# Altium PCB WEB_SERVER.PcbDoc (part 2 of 2)
Units mm, origin at the board's own origin, x right, y up, seen from the top; angles counter-clockwise.
Board outline 87.86 x 117.54 mm, 2 copper layers (Top Layer, Bottom Layer); 161 components, 198 nets, 620 pads, 277 vias.
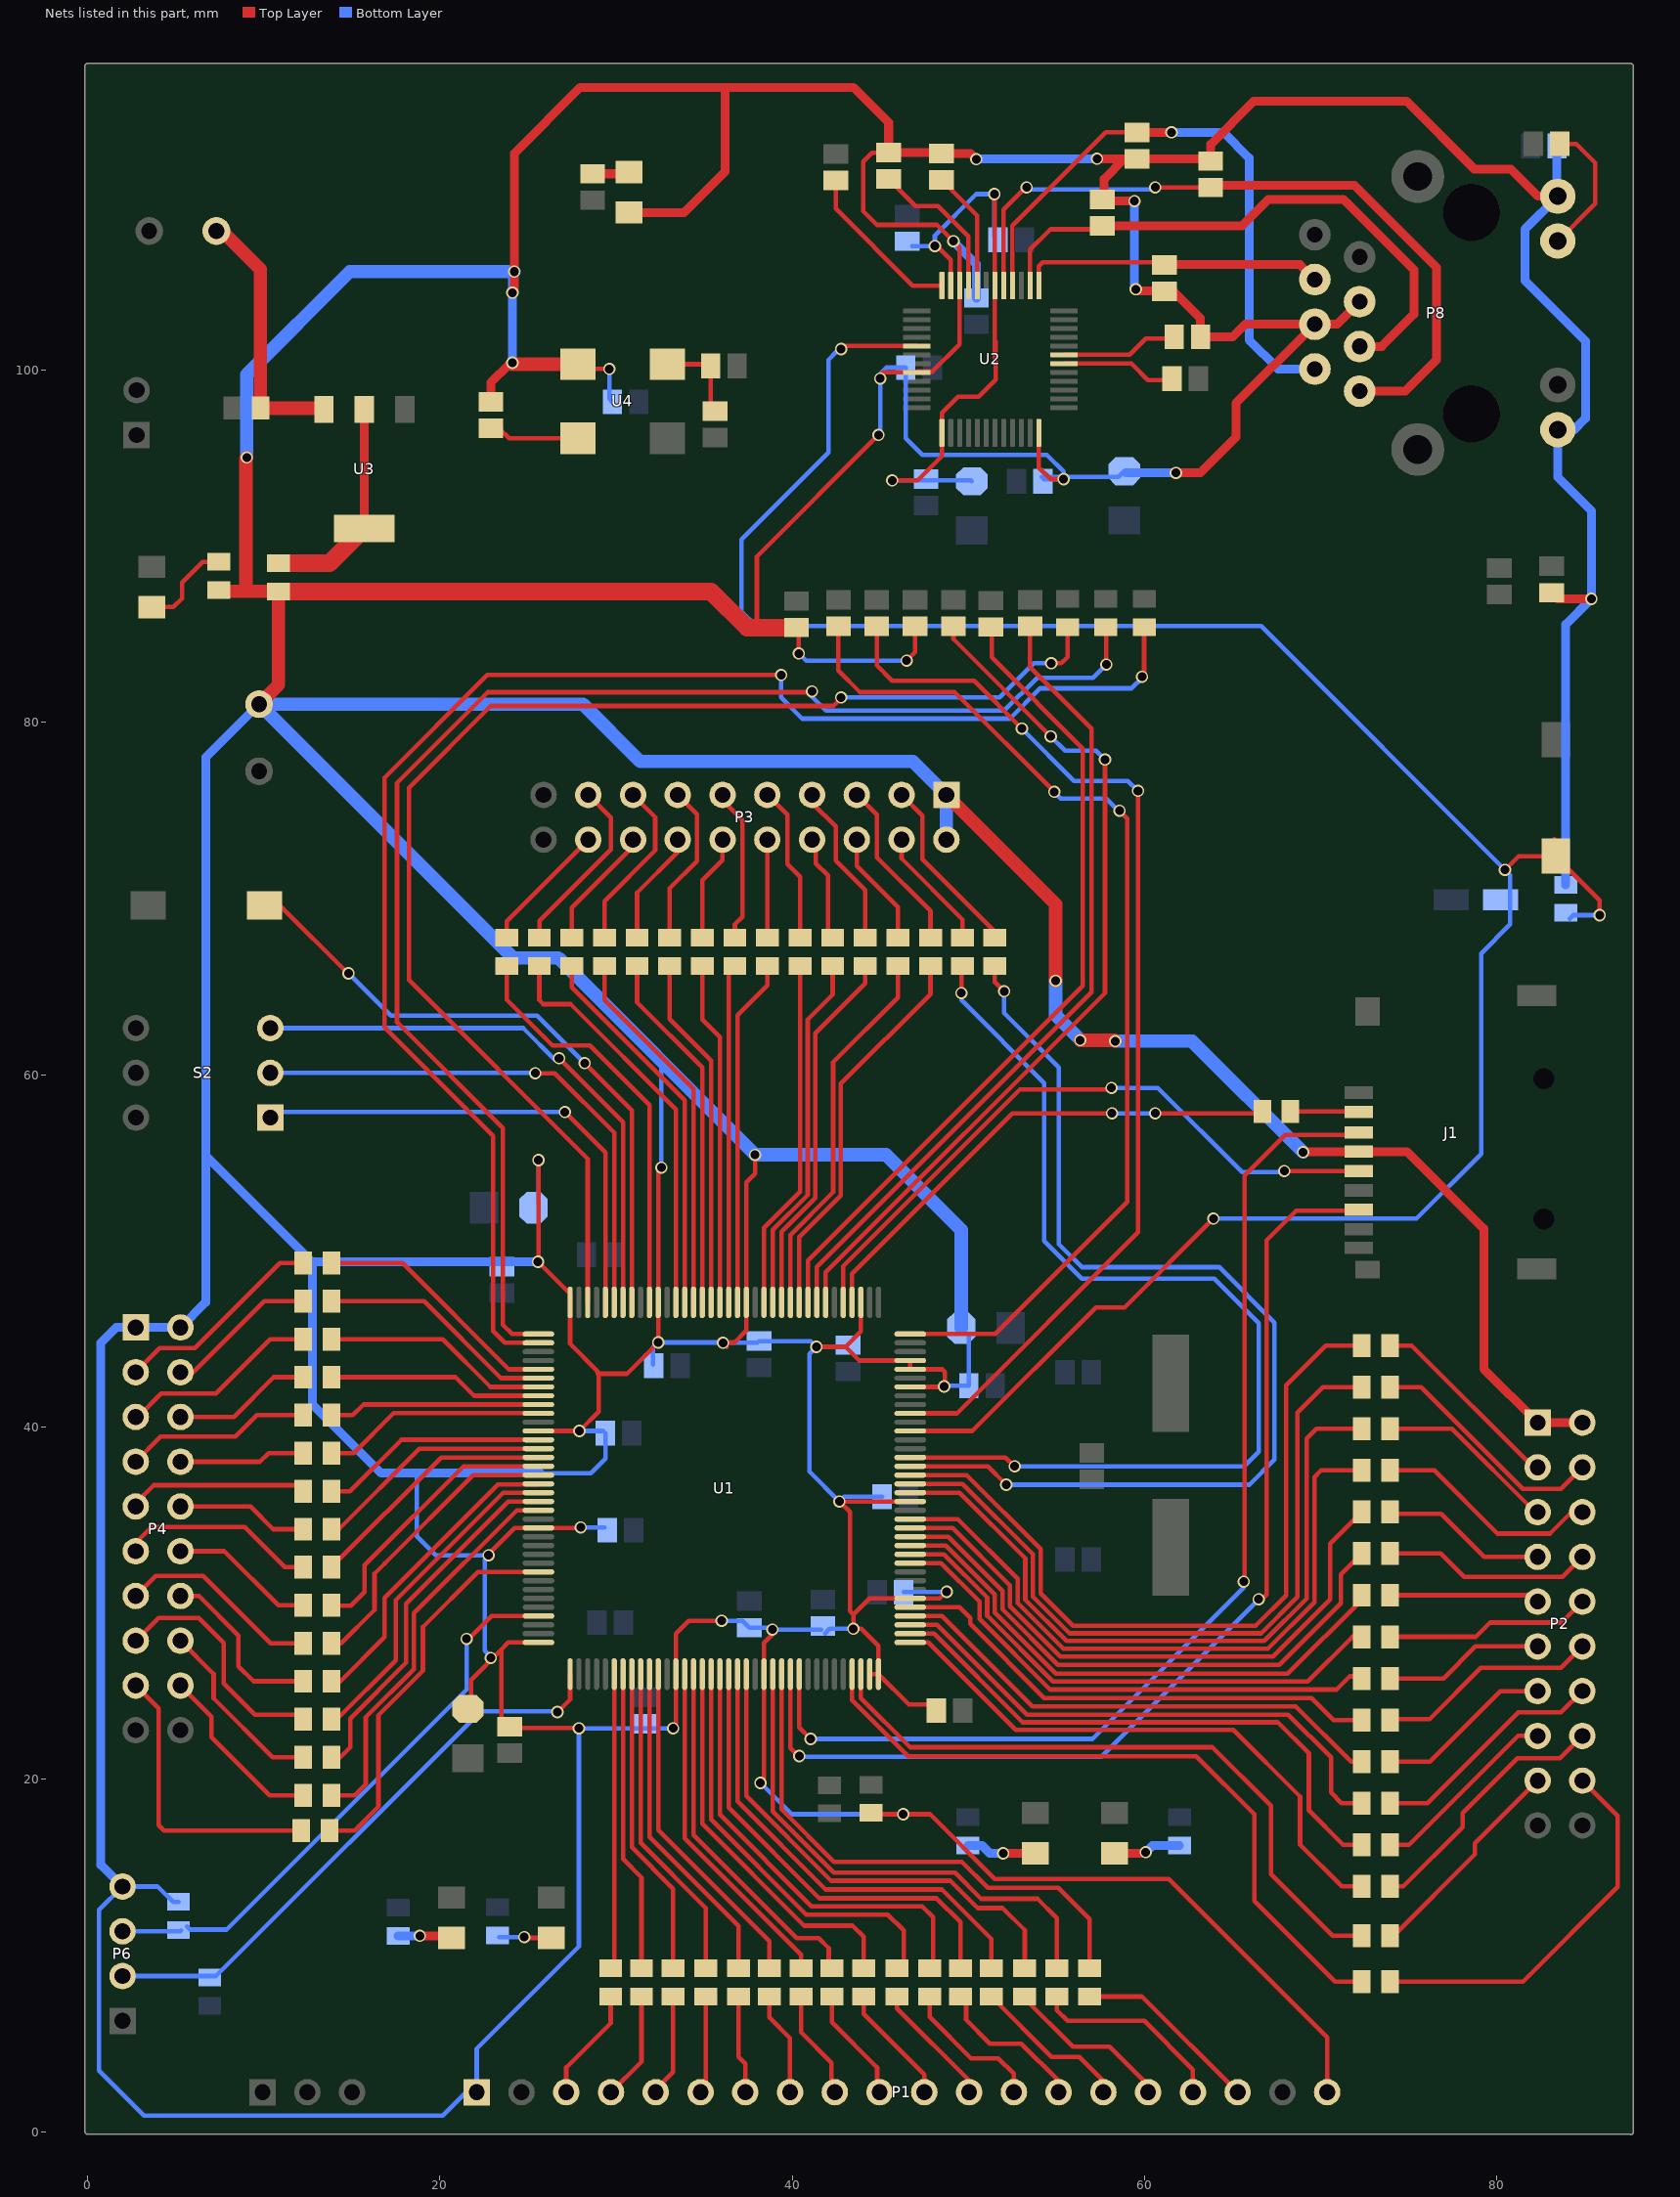
[diagram p2: the nets of this part, all layers, seen from the top]

## Via types
v1: diameter 0.7, hole 0.5, Top Layer to Bottom Layer, 196 vias
v2: diameter 1, hole 0.711, Top Layer to Bottom Layer, 81 vias

## Nets (pads, with @x,y where several pads share a name; then routed paths per layer and width w, separated by ;. In a path a pad name is that pad's centre, name@x,y a point inside that pad or via, vN(x,y) a via of type N, cw(c..) or ccw(c..) an arc to the next point about the centre after c; other vN are vias at no path point) (continued)
NetC23_1: C23.1 C24.1 C25.1 C26.1 U2.18 U2.23 U2.37 | length 37.1
  Top Layer w0.256: v1(45.675,93.725) 47.125,93.725 48.5,95.1 U2.37@48.5,96.42 48.5,97.55 49.425,98.475 50.575,98.475 51.55,99.45 51.55,101.6 ; v1(48.1,107.025) 48.225,107.025 49,106.25 U2.23@49,104.78 ; v1(51.475,109.975) 51.5,109.95 U2.18@51.5,104.78 51.5,100.65
  Bottom Layer w0.256: v1(45.675,93.725) 50.15,93.725 C25.1@50.2,93.675 ; C23.1@46.8,107.025 v1(48.1,107.025) 48.1,107.625 50.45,109.975 v1(51.475,109.975) C26.1@51.475,107.575
NetC34_1: C34.1 F1.2 U3.3 | length 14.8
  Top Layer w0.762: C34.1@7.325,107.875 7.65,107.875 9.825,105.7 F1.2@9.825,97.825 U3.3@13.35,97.825
NetD1_2: D1.2 R86.2 | length 3.9
  Top Layer w0.508: D1.2@58.3,15.807 60.068,15.807 v1(60.068,15.868)
  Bottom Layer w0.508: v1(60.068,15.868) 60.45,16.25 R86.2@61.975,16.25
NetD2_2: D2.2 R89.1 | length 4
  Top Layer w0.508: v1(51.968,15.807) D2.2@53.8,15.807
  Bottom Layer w0.508: R89.1@49.975,16.25 50.775,16.25 51.218,15.807 v1(51.968,15.807)
NetD3_2: D3.2 R90.1 | length 2.9
  Top Layer w0.508: v1(18.875,11.125) D3.2@20.557,11.125
  Bottom Layer w0.508: R90.1@17.65,11.125 v1(18.875,11.125)
NetD4_2: D4.2 R93.1 | length 3
  Top Layer w0.256: v1(24.8,11.05) 24.843,11.007 D4.2@26.325,11.007
  Bottom Layer w0.256: R93.1@23.375,11.05 v1(24.8,11.05)
NetD5_2: D5.2 R94.1 | length 2.1
  Top Layer w0.508: R94.1@28.675,111.125 30.657,111.125 D5.2@30.75,111.218
NetD7_1: D7.1 R103.1 | length 6
  Top Layer w0.256: D7.1@3.675,86.532 4.882,86.532 5.375,87.025 5.375,87.925 6.55,89.1 R103.1@7.475,89.1 ; D7.1@3.675,86.75 D7.1@4.275,86.75
NetR1_2: R1.2 U1.141 | length 39.9
  Top Layer w0.256: U1.141@43.4,25.975 43.4,24.5 46.587,21.312 62.937,21.312 66.225,18.025 66.225,13.1 70.8,8.525 R1.2@72.325,8.525
NetR2_1: R2.1 U1.10 | length 29.1
  Top Layer w0.256: U1.10@46.7,32.275 48.45,32.275 50.63,30.095 50.63,29.113 54.642,25.1 70.9,25.1 71.65,25.85 R2.1@71.925,25.85
NetR3_1: R3.1 U1.46 | length 22.2
  Top Layer w0.256: U1.46@40.4,47.075 40.4,50.787 42.759,53.145 42.759,59.484 47.85,64.575 R3.1@47.85,66.175
NetR4_2: R4.2 U1.142 | length 37.6
  Top Layer w0.256: U1.142@43.9,25.975 43.9,24.613 46.688,21.825 63.85,21.825 67.175,18.5 67.175,14.625 70.675,11.125 R4.2@72.325,11.125
NetR5_1: R5.1 U1.11 | length 30.3
  Top Layer w0.256: U1.11@46.7,32.775 48.612,32.775 51.063,30.323 51.063,29.292 54.806,25.55 69.25,25.55 71.794,28.094 R5.1@72.325,28.094
NetR6_1: R6.1 U1.47 | length 21.6
  Top Layer w0.256: U1.47@39.9,47.075 39.9,50.9 42.325,53.325 42.325,60.7 46,64.375 R6.1@46,66.175
NetR7_2: R7.2 U1.1 | length 33
  Top Layer w0.256: U1.1@46.7,27.775 47.725,27.775 52.693,22.807 65.043,22.807 68.825,19.025 68.825,16.3 71.2,13.925 R7.2@72.325,13.925
NetR8_1: R8.1 U1.12 | length 31.2
  Top Layer w0.256: U1.12@46.7,33.275 48.725,33.275 51.497,30.503 51.497,29.472 54.969,26 68.125,26 72.325,30.2 R8.1@72.325,30.456
NetR9_1: R9.1 U1.36 | length 59.6
  Top Layer w0.256: R9.1@42.625,85.45 42.625,82.925 43.85,81.7 49.225,81.7 v1(54.875,76.05) ; U1.36@46.7,45.275 51.525,45.275 59.025,52.775 59.025,74.525 v1(58.575,74.975)
  Bottom Layer w0.256: v1(54.875,76.05) 55.25,75.675 57.825,75.675 58.525,74.975 v1(58.575,74.975)
NetR10_1: R10.1 U1.48 | length 21.1
  Top Layer w0.256: U1.48@39.4,47.075 39.4,51.073 41.318,52.991 41.318,62.343 44.15,65.175 R10.1@44.15,66.175
NetR11_2: R11.2 U1.2 | length 32.5
  Top Layer w0.256: U1.2@46.7,28.275 48.05,28.275 53.084,23.241 67.559,23.241 69.325,21.475 69.325,18.225 71.263,16.287 R11.2@72.325,16.287
NetR12_1: R12.1 U1.13 | length 32.8
  Top Layer w0.256: U1.13@46.7,33.775 48.85,33.775 51.931,30.694 51.931,29.652 55.083,26.5 67.65,26.5 71.15,30 71.15,31.642 R12.1@72.325,32.817
NetR13_1: R13.1 U1.133 | length 30.5
  Top Layer w0.256: U1.133@39.4,25.975 39.4,18.3 42.375,15.325 49.625,15.325 51.1,13.85 55.1,13.85 56.875,12.075 R13.1@56.875,9.275
NetR14_2: R14.2 U1.3 | length 31
  Top Layer w0.256: U1.3@46.7,28.775 48.225,28.775 53.325,23.675 68.15,23.675 70.575,21.25 70.575,19.25 71.177,18.648 R14.2@72.325,18.648
NetR15_1: R15.1 U1.14 | length 34.6
  Top Layer w0.256: U1.14@46.7,34.275 49.1,34.275 52.365,31.01 52.365,29.831 55.214,26.982 67.282,26.982 70.525,30.225 70.525,33.379 R15.1@72.325,35.179
NetR16_2: R16.2 U1.40 | length 28.8
  Top Layer w0.256: U1.40@43.4,47.075 43.4,48.7 52.5,57.8 v1@58.1,57.8 ; v1(60.6,57.8) 66.575,57.8 R16.2@66.675,57.9
  Bottom Layer w0.256: v1@58,57.8 v1(60.6,57.8)
  other v1: 58.15,57.8
NetR17_2: R17.2 U1.100 | length 22.4
  Top Layer w0.256: R17.2@13.75,17.1 15.175,17.1 16.525,18.45 16.525,23.637 19.05,26.162 19.05,28.65 22.175,31.775 U1.100@25.6,31.775
NetR18_2: R18.2 U1.4 | length 29
  Top Layer w0.256: U1.4@46.7,29.275 48.5,29.275 53.625,24.15 68.575,24.15 71.715,21.01 R18.2@72.325,21.01
NetR19_1: R19.1 U1.15 | length 37.8
  Top Layer w0.256: U1.15@46.7,34.775 49.4,34.775 52.799,31.376 52.799,30.011 55.393,27.416 66.991,27.416 69.634,30.059 69.634,37.159 70.015,37.54 R19.1@72.325,37.54
NetR21_2: R21.2 U1.5 | length 28.5
  Top Layer w0.256: U1.5@46.7,29.775 49.5,29.775 50.1,29.175 50.1,28.825 54.3,24.625 69.475,24.625 70.729,23.371 R21.2@72.325,23.371
NetR22_1: R22.1 U1.18 | length 40.8
  Top Layer w0.256: U1.18@46.7,36.275 49.5,36.275 53.232,32.543 53.232,30.191 55.573,27.85 66.788,27.85 69.2,30.262 69.2,39.35 69.752,39.902 R22.1@72.325,39.902
NetR23_2: R23.2 U1.58 | length 21.2
  Top Layer w0.256: R23.2@29.35,66.175 29.35,64.225 34.4,59.175 U1.58@34.4,47.075
NetR24_1: R24.1 U1.19 | length 42.5
  Top Layer w0.256: U1.19@46.7,36.775 49.675,36.775 53.666,32.784 53.666,30.37 55.745,28.291 66.616,28.291 68.675,30.35 68.675,40.825 70.113,42.263 R24.1@72.325,42.263
NetR25_2: R25.2 U1.43 | length 49.5
  Top Layer w0.256: U1.43@41.9,47.075 41.9,48.775 57.75,64.625 v1(57.75,77.875) ; R25.2@49.15,85.45 49.15,84.725 v1(54.675,79.2)
  Bottom Layer w0.256: v1(54.675,79.2) 55.5,78.375 57.25,78.375 v1(57.75,77.875)
NetR26_2: R26.2 U1.59 | length 21.8
  Top Layer w0.256: R26.2@27.5,66.175 27.5,64.95 33.9,58.55 U1.59@33.9,47.075
NetR27_1: R27.1 U1.20 | length 44.2
  Top Layer w0.256: U1.20@46.7,37.275 49.9,37.275 54.1,33.075 54.1,30.55 55.925,28.725 66.3,28.725 68.025,30.45 68.025,42.375 70.275,44.625 R27.1@72.325,44.625
NetR28_2: R28.2 U1.60 | length 23.2
  Top Layer w0.256: R28.2@25.65,66.175 25.65,64.225 25.875,64 27.425,64 33.4,58.025 U1.60@33.4,47.075
NetR29_1: R29.1 U1.21 | length 60.9
  Top Layer w0.256: U1.21@46.7,37.775 51.1,37.775 v1(52.15,36.725) ; R29.1@51.5,66.175 51.5,65.25 v1(52.025,64.725)
  Bottom Layer w0.256: v1(52.025,64.725) 52.025,63.5 55.125,60.4 55.125,50.375 56.425,49.075 64.225,49.075 67.375,45.925 67.375,38.15 65.95,36.725 v1(52.15,36.725)
NetR30_2: R30.2 U1.63 | length 23.7
  Top Layer w0.256: R30.2@23.8,66.175 23.8,64.25 26.4,61.65 28.525,61.65 31.9,58.275 U1.63@31.9,47.075
NetR31_1: R31.1 U1.22 | length 59.2
  Top Layer w0.256: U1.22@46.7,38.275 52.1,38.275 v1@52.625,37.75 ; v1(49.6,64.625) R31.1@49.6,66.1
  Bottom Layer w0.256: v1(49.6,64.625) 49.6,64.225 54.3,59.525 54.3,50.55 56.425,48.425 63.95,48.425 66.475,45.9 66.475,38.6 65.65,37.775 v1(52.625,37.775)
NetR33_1: R33.1 U1.49 | length 20.5
  Top Layer w0.256: U1.49@38.9,47.075 38.9,51.187 40.884,53.17 40.884,63.134 42.3,64.55 R33.1@42.3,66.175
NetR34_1: R34.1 U1.70 | length 75.5
  Top Layer w0.256: U1.70@28.4,47.075 28.4,55.225 18.25,65.375 18.25,76.275 22.9,80.925 42.35,80.925 v1@42.775,81.35 ; v1(54.7,83.35) 55.275,83.35 55.625,83.7 R34.1@55.625,85.4
  Bottom Layer w0.256: v1(42.775,81.4) 51.775,81.4 53.725,83.35 v1(54.7,83.35)
NetR35_1: R35.1 U1.50 | length 19.9
  Top Layer w0.256: U1.50@38.4,47.075 38.4,51.3 40.45,53.35 R35.1@40.45,66.175
NetR36_1: R36.1 U1.73 | length 81.8
  Top Layer w0.256: U1.73@25.6,45.275 24.1,45.275 23.575,45.8 23.575,56.975 17.575,62.975 17.575,76.555 22.72,81.7 v1@41.175,81.7 ; R36.1@57.8,85.4 57.825,85.375 v1(57.825,83.275)
  Bottom Layer w0.256: v1(41.125,81.75) 41.125,81.45 41.925,80.65 52.025,80.65 53.9,82.525 57.075,82.525 v1(57.825,83.275)
NetR37_1: R37.1 U1.53 | length 19.8
  Top Layer w0.256: U1.53@36.9,47.075 36.9,63.375 38.6,65.075 R37.1@38.6,66.175
NetR38_1: R38.1 U1.74 | length 87.6
  Top Layer w0.256: U1.74@25.6,44.775 23.7,44.775 23.025,45.45 23.025,56.525 16.875,62.675 16.875,76.845 22.705,82.675 v1(39.375,82.675) ; v1@59.975,82.7 R38.1@59.975,85.4
  Bottom Layer w0.256: v1(39.375,82.675) 39.375,81.4 40.575,80.2 52.35,80.2 54.075,81.925 59.275,81.925 v1@59.875,82.525
  other v1: 59.85,82.575
NetR39_1: R39.1 U1.54 | length 18.8
  Top Layer w0.256: U1.54@36.4,47.075 R39.1@36.4,65.825
NetR40_1: R40.1 U1.55 | length 19.5
  Top Layer w0.256: R40.1@34.9,66.175 34.9,63.125 35.9,62.125 U1.55@35.9,47.075
NetR41_2: R41.2 U1.56 | length 20.1
  Top Layer w0.256: R41.2@33.05,66.175 33.05,63.15 35.4,60.8 U1.56@35.4,47.075
NetR42_1: R42.1 U1.114 | length 16.8
  Top Layer w0.256: R42.1@29.7,9.275 29.9,9.475 U1.114@29.9,25.975
NetR43_2: R43.2 U1.57 | length 20.6
  Top Layer w0.256: R43.2@31.2,66.175 31.2,64.1 34.9,60.4 U1.57@34.9,47.075
NetR45_1: R45.1 U1.27 | length 62.2
  Top Layer w0.256: R45.1@44.8,85.45 44.8,83.225 45.675,82.35 50.325,82.35 v1(53.038,79.637) ; U1.27@46.7,40.775 49.35,40.775 59.625,51.05 v1(59.625,76.1)
  Bottom Layer w0.256: v1(53.038,79.637) 56,76.675 59.05,76.675 v1(59.625,76.1)
NetR46_1: R46.1 U1.115 | length 17.1
  Top Layer w0.256: U1.115@30.4,25.975 30.4,15.475 31.45,14.425 R46.1@31.45,9.275
NetR47_2: R47.2 U1.87 | length 14.3
  Top Layer w0.256: R47.2@13.85,32.043 20.082,38.275 U1.87@25.6,38.275
NetR48_1: R48.1 U1.116 | length 17.7
  Top Layer w0.256: U1.116@30.9,25.975 30.9,16.15 33.25,13.8 R48.1@33.25,9.275
NetR49_2: R49.2 U1.88 | length 15.9
  Top Layer w0.256: R49.2@13.886,29.85 14.95,29.85 15.725,30.625 15.725,32.15 21.35,37.775 U1.88@25.6,37.775
NetR50_1: R50.1 U1.117 | length 18.2
  Top Layer w0.256: U1.117@31.4,25.975 31.4,16.4 35.1,12.7 R50.1@35.1,9.275
NetR51_2: R51.2 U1.89 | length 16.9
  Top Layer w0.256: R51.2@13.85,27.729 14.404,27.729 16.3,29.625 16.3,31.675 16.882,32.257 21.9,37.275 U1.89@25.6,37.275
NetR52_1: R52.1 U1.44 | length 46.3
  Top Layer w0.256: U1.44@41.4,47.075 41.4,49.075 57,64.675 57,79.625 53.5,83.125 R52.1@53.5,85.45
NetR53_1: R53.1 U1.118 | length 18.8
  Top Layer w0.256: U1.118@31.9,25.975 31.9,16.725 36.95,11.675 R53.1@36.95,9.275
NetR54_2: R54.2 U1.90 | length 17.7
  Top Layer w0.256: R54.2@13.85,25.571 14.371,25.571 16.875,28.075 16.875,30.3 23.306,36.731 25.6,36.731 U1.90@25.6,36.775
NetR55_1: R55.1 U1.45 | length 47
  Top Layer w0.256: U1.45@40.9,47.075 40.9,49.446 56.5,65.046 56.5,78.5 51.325,83.675 R55.1@51.325,85.45
NetR56_1: R56.1 U1.119 | length 19.3
  Top Layer w0.256: U1.119@32.4,25.975 32.4,17.125 38.7,10.825 R56.1@38.7,9.275
NetR57_2: R57.2 U1.91 | length 19.1
  Top Layer w0.256: R57.2@13.85,23.414 14.164,23.414 17.5,26.75 17.5,30.175 23.6,36.275 U1.91@25.6,36.275
NetR59_1: R59.1 U1.122 | length 19.4
  Top Layer w0.256: U1.122@33.9,25.975 33.906,25.969 33.906,22.628 33.9,22.623 33.9,16.65 40.5,10.05 R59.1@40.5,9.275
NetR60_2: R60.2 U1.92 | length 20.7
  Top Layer w0.256: R60.2@13.85,21.257 14.357,21.257 14.925,21.825 14.925,23.45 18.099,26.624 18.099,29.974 23.9,35.775 U1.92@25.6,35.775
NetR61_1: R61.1 U1.123 | length 20.9
  Top Layer w0.256: U1.123@34.4,25.975 34.4,16.857 40.257,11 41.5,11 42.075,10.425 42.075,9.45 R61.1@42.25,9.275 R61.1@41.982,9.275
NetR62_2: R62.2 U1.93 | length 22.8
  Top Layer w0.256: R62.2@13.85,19.325 R62.2@13.85,19.1 15.175,19.1 15.8,19.725 15.8,23.525 18.532,26.257 18.532,29.432 24.375,35.275 U1.93@25.6,35.275
NetR63_1: R63.1 U1.77 | length 14.2
  Top Layer w0.256: R63.1@13.85,49.3 17.9,49.3 23.925,43.275 U1.77@25.6,43.275
NetR64_2: R64.2 U1.124 | length 22.1
  Top Layer w0.256: U1.124@34.9,25.975 34.9,17.475 40.675,11.7 43.425,11.7 44.05,11.075 R64.2@44.05,9.275
NetR65_1: R65.1 U1.78 | length 13.6
  Top Layer w0.256: R65.1@13.85,47.143 19.107,47.143 23.475,42.775 U1.78@25.6,42.775
NetR66_2: R66.2 U1.125 | length 23.6
  Top Layer w0.256: U1.125@35.4,25.975 35.4,17.725 40.8,12.325 45.425,12.325 46.325,11.425 R66.2@46.325,9.6
NetR68_1: R68.1 U1.79 | length 12.9
  Top Layer w0.256: R68.1@13.85,44.986 20.164,44.986 22.875,42.275 U1.79@25.6,42.275
NetR69_2: R69.2 U1.126 | length 25.5
  Top Layer w0.256: U1.126@35.9,25.975 35.9,18 41.1,12.8 47.375,12.8 48,12.175 48,9.475 R69.2@47.8,9.275
NetR70_1: R70.1 U1.80 | length 12.2
  Top Layer w0.256: R70.1@13.85,42.829 20.896,42.829 21.95,41.775 U1.80@25.6,41.775
NetR71_2: R71.2 U1.127 | length 26
  Top Layer w0.256: U1.127@36.4,25.975 36.4,18.4 41.55,13.25 48.2,13.25 49.55,11.9 R71.2@49.55,9.275
NetR72_1: R72.1 U1.81 | length 12
  Top Layer w0.256: R72.1@13.85,40.671 15.071,40.671 15.675,41.275 U1.81@25.6,41.275
NetR73_2: R73.2 U1.128 | length 26.5
  Top Layer w0.256: U1.128@36.9,25.975 36.9,18.75 41.9,13.75 48.5,13.75 51.3,10.95 R73.2@51.3,9.275
NetR74_1: R74.1 U1.82 | length 12.7
  Top Layer w0.256: R74.1@13.85,38.514 15.114,38.514 17.381,40.781 25.594,40.781 U1.82@25.6,40.775
NetR76_2: R76.2 U1.129 | length 28
  Top Layer w0.256: U1.129@37.4,25.975 37.4,19.062 42.212,14.25 48.975,14.25 50.525,12.7 51.95,12.7 53.2,11.45 R76.2@53.2,9.275
NetR77_1: R77.1 U1.85 | length 13
  Top Layer w0.256: R77.1@13.85,36.357 14.907,36.357 17.825,39.275 U1.85@25.6,39.275
NetR78_2: R78.2 U1.132 | length 29.3
  Top Layer w0.256: U1.132@38.9,25.975 38.9,18.175 42.375,14.7 49.25,14.7 50.725,13.225 53.925,13.225 55.025,12.125 R78.2@55.025,9.275
NetR79_1: R79.1 U1.86 | length 13.6
  Top Layer w0.256: R79.1@13.85,34.2 14.275,34.2 18.85,38.775 U1.86@25.6,38.775
NetR81_1: R81.1 U2.7 | length 6.5
  Top Layer w0.256: U2.7@55.43,100.85 59.15,100.85 60.075,101.775 R81.1@61.575,101.775
NetR82_1: R82.1 U2.21 | length 8.7
  Top Layer w0.256: R82.1@45.475,110.825 47,109.3 48.275,109.3 50,107.575 U2.21@50,104.78
NetR83_1: R83.1 U2.20 | length 6.8
  Top Layer w0.256: R83.1@48.475,110.775 50.5,108.75 U2.20@50.5,104.78
NetR84_1: R84.1 U2.24 | length 9.4
  Top Layer w0.256: R84.1@42.475,110.75 42.475,109.15 46.845,104.78 U2.24@48.5,104.78
NetR96_2: R96.2 U3.2 U3.4 | length 12.4
  Top Layer w0.5: U3.4@15.725,91 U3.2@15.725,97.75
  Top Layer w1: R96.2@10.85,89.025 13.75,89.025 U3.4@15.725,91
NetR99_1: R99.1 U4.1 | length 5.2
  Top Layer w0.256: R99.1@22.9,96.675 23.375,96.675 23.933,96.117 U4.1@27.835,96.117
NetR102_2: R102.2 R105.1 U4.3 | length 5
  Top Layer w0.256: U4.3@32.915,100.317 R102.2@35.283,100.317 ; R102.2@35.375,100.225 35.375,97.9 R105.1@35.625,97.65
NRST: C22.1 R85.1 SW1.1 U1.25 U2.29 | length 137.2
  Top Layer w0.256: v1(42.775,101.175) 42.95,101.35 U2.29@47.07,101.35 ; U1.25@46.7,39.775 50.223,39.775 57.232,46.785 58.86,46.785 v1(63.9,51.825) ; v1(80.45,71.625) 81.225,72.4 SW1.1@83.25,72.4 ; SW1.1@83.25,73.35 SW1.1@83.25,72.4 ; v1(85.825,69.05) 85.825,69.9 SW1.1@83.325,72.4 SW1.1@83.25,72.4
  Bottom Layer w0.256: v1(42.775,101.175) 42.675,101.075 42.564,101.075 42.058,100.569 42.058,95.308 37.125,90.375 37.125,86.275 37.95,85.45 66.625,85.45 v1(80.45,71.625) 80.75,71.325 80.75,68.525 79.1,66.875 79.1,55.5 75.425,51.825 v1(63.9,51.825) ; R85.1@84.125,68.85 84.325,69.05 v1(85.825,69.05)
PA8: P4.17 R17.1 | length 16.7
  Top Layer w0.256: P4.17@2.75,25.33 4.05,24.03 4.05,17.4 4.35,17.1 R17.1@12.15,17.1
PB0: P3.5 R3.2 | length 9.8
  Top Layer w0.256: P3.5@43.67,75.875 44.8,74.745 44.8,72.325 47.85,69.275 R3.2@47.85,67.775
PB1: P3.6 R6.2 | length 6.5
  Top Layer w0.256: P3.6@43.67,73.335 43.67,71.83 46,69.5 R6.2@46,67.775
PB2: P3.7 R10.2 | length 9.4
  Top Layer w0.256: P3.7@41.13,75.875 41.13,75.42 42.475,74.075 42.475,72.15 44.15,70.475 R10.2@44.15,67.775
PB3: P1.18 R13.2 | length 10.7
  Top Layer w0.256: R13.2@56.875,7.675 59.855,7.675 P1.18@65.28,2.25
PD0: P1.3 R42.2 | length 6.5
  Top Layer w0.256: P1.3@27.18,2.25 27.18,3.655 29.7,6.175 R42.2@29.7,7.675
PD1: P1.4 R46.2 | length 6.1
  Top Layer w0.256: P1.4@29.72,2.25 31.45,3.98 R46.2@31.45,7.675
PD2: P1.5 R48.2 | length 5.8
  Top Layer w0.256: P1.5@32.26,2.25 32.26,2.41 33.25,3.4 R48.2@33.25,7.675
PD3: P1.6 R50.2 | length 5.5
  Top Layer w0.256: P1.6@34.8,2.25 35.1,2.55 R50.2@35.1,7.675
PD4: P1.7 R53.2 | length 5.6
  Top Layer w0.256: R53.2@36.95,7.675 36.95,4.25 37.34,3.86 P1.7@37.34,2.25
PD5: P1.8 R56.2 | length 5.9
  Top Layer w0.256: R56.2@38.7,7.675 38.7,6.5 39.88,5.32 P1.8@39.88,2.25
PD6: P1.9 R59.2 | length 6.2
  Top Layer w0.256: R59.2@40.5,7.675 40.5,5.65 42.225,3.925 42.225,2.445 P1.9@42.42,2.25
PD7: P1.10 R61.2 | length 6.5
  Top Layer w0.256: R61.2@42.25,7.675 42.25,6.225 44.825,3.65 44.825,2.385 P1.10@44.96,2.25
PD8: P4.3 R63.2 | length 12.1
  Top Layer w0.256: P4.3@2.75,43.11 4.115,44.475 6.1,44.475 10.925,49.3 R63.2@12.25,49.3
PD9: P4.4 R65.2 | length 8.6
  Top Layer w0.256: P4.4@5.29,43.11 6.01,43.11 10.043,47.143 R65.2@12.25,47.143
PD10: P4.5 R68.2 | length 11.3
  Top Layer w0.256: P4.5@2.75,40.57 2.87,40.57 4.2,41.9 7.3,41.9 10.386,44.986 R68.2@12.25,44.986
PD11: P4.6 R70.2 | length 7.9
  Top Layer w0.256: P4.6@5.29,40.57 8.32,40.57 10.579,42.829 R70.2@12.25,42.829
PD12: P4.7 R72.2 | length 10.6
  Top Layer w0.256: P4.7@2.75,38.03 4.17,39.45 8.4,39.45 9.621,40.671 R72.2@12.25,40.671
PD13: P4.8 R74.2 | length 7.2
  Top Layer w0.256: P4.8@5.29,38.03 9.805,38.03 10.289,38.514 R74.2@12.25,38.514
PD14: P4.9 R77.2 | length 10.3
  Top Layer w0.256: P4.9@2.75,35.49 2.75,35.675 3.775,36.7 11.907,36.7 R77.2@12.25,36.357
PD15: P4.10 R79.2 | length 7.5
  Top Layer w0.256: P4.10@5.29,35.49 9.26,35.49 10.55,34.2 R79.2@12.25,34.2
PE0: P2.18 R1.1 | length 22
  Top Layer w0.256: R1.1@73.925,8.525 81.475,8.525 86.85,13.9 86.85,17.92 P2.18@84.84,19.93
PE1: P2.17 R4.1 | length 12.4
  Top Layer w0.256: R4.1@73.925,11.125 74.125,11.125 78.75,15.75 78.75,16.38 P2.17@82.3,19.93
PE2: P2.16 R7.1 | length 14.9
  Top Layer w0.256: R7.1@73.925,13.925 74.675,13.925 78.05,17.3 78.05,18.1 81.15,21.2 83.57,21.2 P2.16@84.84,22.47
PE3: P2.15 R11.1 | length 10.9
  Top Layer w0.256: R11.1@73.925,16.287 75.012,16.287 81.195,22.47 P2.15@82.3,22.47
PE4: P2.14 R14.1 | length 13.6
  Top Layer w0.256: R14.1@73.925,18.648 76.048,18.648 81.2,23.8 83.63,23.8 P2.14@84.84,25.01
PE5: P2.13 R18.1 | length 10
  Top Layer w0.256: R18.1@73.925,21.01 76.185,21.01 80.185,25.01 P2.13@82.3,25.01
PE6: P2.12 R21.1 | length 12.6
  Top Layer w0.256: R21.1@73.925,23.371 73.979,23.425 76.175,23.425 79.075,26.325 83.615,26.325 P2.12@84.84,27.55
PE7: P3.15 R23.1 | length 9.8
  Top Layer w0.256: R23.1@29.35,67.775 29.35,69.85 32.225,72.725 32.225,74.62 P3.15@30.97,75.875
PE8: P3.16 R26.1 | length 7
  Top Layer w0.256: R26.1@27.5,67.775 27.5,69.475 30.97,72.945 P3.16@30.97,73.335
PE9: P3.17 R28.1 | length 10.3
  Top Layer w0.256: R28.1@25.65,67.775 25.675,67.8 25.675,68.725 29.725,72.775 29.725,74.58 P3.17@28.43,75.875
PE10: P3.18 R30.1 | length 7.5
  Top Layer w0.256: R30.1@23.8,67.775 23.8,68.705 P3.18@28.43,73.335
PF0: P2.11 R2.2 | length 9.1
  Top Layer w0.256: R2.2@73.925,25.733 76.958,25.733 78.775,27.55 P2.11@82.3,27.55
PF1: P2.10 R5.2 | length 11.7
  Top Layer w0.256: R5.2@73.925,28.094 78.794,28.094 79.6,28.9 83.65,28.9 P2.10@84.84,30.09
PF2: P2.9 R8.2 | length 8.5
  Top Layer w0.256: R8.2@73.925,30.456 81.934,30.456 P2.9@82.3,30.09
PF3: P2.8 R12.2 | length 11.9
  Top Layer w0.256: R12.2@73.925,32.817 76.808,32.817 78.125,31.5 83.71,31.5 P2.8@84.84,32.63
PF4: P2.7 R15.2 | length 9.4
  Top Layer w0.256: R15.2@73.925,35.179 74.029,35.075 76.825,35.075 79.27,32.63 P2.7@82.3,32.63
PF5: P2.6 R19.2 | length 12.9
  Top Layer w0.256: R19.2@73.925,37.54 76.435,37.54 80.025,33.95 83,33.95 84.22,35.17 P2.6@84.84,35.17
PF6: P2.5 R22.2 | length 10.3
  Top Layer w0.256: R22.2@73.925,39.902 77.435,39.902 82.167,35.17 P2.5@82.3,35.17
PF7: P2.4 R24.2 | length 13.8
  Top Layer w0.256: R24.2@73.925,42.263 75.687,42.263 81.45,36.5 83.63,36.5 P2.4@84.84,37.71
PF8: P2.3 R27.2 | length 11.2
  Top Layer w0.256: R27.2@73.925,44.625 75.15,44.625 82.065,37.71 P2.3@82.3,37.71
PF9: P3.3 R29.2 | length 10.3
  Top Layer w0.256: P3.3@46.21,75.875 47.4,74.685 47.4,72.225 51.5,68.125 R29.2@51.5,67.775
PF10: P3.4 R31.2 | length 7
  Top Layer w0.256: P3.4@46.21,73.335 46.21,72.265 49.675,68.8 R31.2@49.675,67.775
PF11: P3.8 R33.2 | length 6
  Top Layer w0.256: P3.8@41.13,73.335 41.35,73.115 41.35,71.975 42.025,71.3 42.025,68.05 R33.2@42.3,67.775
PF12: P3.9 R35.2 | length 8.9
  Top Layer w0.256: P3.9@38.59,75.875 39.725,74.74 39.725,71.95 40.45,71.225 R35.2@40.45,67.775
PF13: P3.10 R37.2 | length 5.5
  Top Layer w0.256: R37.2@38.59,67.785 P3.10@38.59,73.335
PF14: P3.11 R39.2 | length 8.7
  Top Layer w0.256: P3.11@36.05,75.875 36.05,75.575 37.175,74.45 37.175,68.95 36.75,68.525 R39.2@36.75,67.775
PF15: P3.12 R40.2 | length 6
  Top Layer w0.256: R40.2@34.9,67.775 34.9,71.025 36.05,72.175 P3.12@36.05,73.335
PG0: P3.13 R41.1 | length 9.2
  Top Layer w0.256: R41.1@33.05,67.775 33.05,70.575 34.6,72.125 34.6,74.785 P3.13@33.51,75.875
PG1: P3.14 R43.1 | length 6.5
  Top Layer w0.256: R43.1@31.2,67.775 31.2,70.325 33.51,72.635 P3.14@33.51,73.335
PG2: P4.11 R47.1 | length 11.3
  Top Layer w0.256: P4.11@2.75,32.95 2.75,33.425 3.65,34.325 8.925,34.325 11.207,32.043 R47.1@12.25,32.043
PG3: P4.12 R49.1 | length 8.2
  Top Layer w0.256: P4.12@5.29,32.95 7.775,32.95 10.839,29.886 R49.1@12.25,29.886
PG4: P4.13 R51.1 | length 11.6
  Top Layer w0.256: P4.13@2.75,30.41 3.89,31.55 6.575,31.55 10.396,27.729 R51.1@12.25,27.729
PG5: P4.14 R54.1 | length 10
  Top Layer w0.256: P4.14@5.29,30.41 6.34,30.41 8.575,28.175 8.575,26.425 9.429,25.571 R54.1@12.25,25.571
PG6: P4.15 R57.1 | length 13.8
  Top Layer w0.256: P4.15@2.75,27.87 4.055,29.175 6.325,29.175 7.75,27.75 7.75,25.45 9.525,23.675 11.989,23.675 R57.1@12.25,23.414
PG7: P4.16 R60.1 | length 10.5
  Top Layer w0.256: P4.16@5.29,27.87 7.175,25.985 7.175,24.6 10.518,21.257 R60.1@12.25,21.257
PG8: P4.18 R62.1 | length 10.2
  Top Layer w0.256: P4.18@5.29,25.33 5.29,25.31 7.05,23.55 7.05,22.4 10.35,19.1 R62.1@12.25,19.1
PG9: P1.11 R64.1 | length 6.9
  Top Layer w0.256: R64.1@44.05,7.675 44.05,6.7 47.5,3.25 P1.11@47.5,2.25
PG10: P1.12 R66.1 | length 7.1
  Top Layer w0.256: R66.1@45.95,7.675 45.95,7 50.04,2.91 P1.12@50.04,2.25
PG11: P1.13 R69.1 | length 8.3
  Top Layer w0.256: R69.1@47.8,7.675 47.8,6.525 50.15,4.175 51.7,4.175 52.58,3.295 P1.13@52.58,2.25
PG12: P1.14 R71.1 | length 8.8
  Top Layer w0.256: R71.1@49.55,7.675 49.875,7.35 49.875,6.35 51.225,5 53,5 55.12,2.88 P1.14@55.12,2.25
PG13: P1.15 R73.1 | length 9
  Top Layer w0.256: R73.1@51.3,7.675 54.725,4.25 56.3,4.25 57.66,2.89 P1.15@57.66,2.25
PG14: P1.16 R76.1 | length 9.6
  Top Layer w0.256: R76.1@53.2,7.675 53.2,7.55 55.925,4.825 58.025,4.825 60.2,2.65 P1.16@60.2,2.25
PG15: P1.17 R78.1 | length 11.2
  Top Layer w0.256: R78.1@55.025,7.675 55.025,6.9 55.625,6.3 59.975,6.3 62.74,3.535 P1.17@62.74,2.25
RJ45RD+: P8.3 R100.1 U2.14 | length 32.9
  Top Layer w0.256: U2.14@53.5,104.78 53.5,106.825 54.65,107.975 R100.1@57.6,107.975
  Top Layer w0.5: R100.1@57.6,108.175 65.525,108.175 67.025,109.675 71.275,109.675 75.275,105.675 75.275,103.15 73.45,101.325 P8.3@72.2,101.325
RJ45RD-: P8.6 R101.1 U2.13 | length 16.9
  Top Layer w0.256: U2.13@54,104.78 54,105.88 54.225,106.105 R101.1@60.45,106.105
  Top Layer w0.5: R101.1@60.775,105.975 68.81,105.975 P8.6@69.66,105.125
RJ45TD+: P8.1 R97.1 U2.17 | length 42.3
  Top Layer w0.256: U2.17@52,104.78 52,109.1 53.25,110.35 v1(53.3,110.35) ; v1(60.6,110.35) R97.1@63.725,110.35
  Top Layer w0.5: R97.1@63.725,110.175 64.025,110.475 71.9,110.475 76.575,105.8 76.575,100.575 74.785,98.785 P8.1@72.2,98.785
  Bottom Layer w0.256: v1(53.3,110.35) 53.25,110.35 53.131,110.231 60.481,110.231 v1(60.6,110.35)
RJ45TD-: P8.2 R98.1 U2.16 | length 34.4
  Top Layer w0.256: U2.16@52.5,104.78 52.5,108.175 57.8,113.475 R98.1@59.575,113.475
  Top Layer w0.5: R98.1@59.575,113.475 v1(61.525,113.475)
  Bottom Layer w0.5: v1(61.525,113.475) 64.475,113.475 65.925,112.025 65.925,101.7 67.58,100.045 P8.2@69.66,100.045
SD_CS: J1.2 R16.1 | length 3.9
  Top Layer w0.256: R16.1@68.275,57.9 J1.2@72.125,57.9
SD_MISO: J1.7 U1.134 | length 61.5
  Top Layer w0.256: U1.134@39.9,25.975 39.9,21.775 40.35,21.325 v1(40.4,21.325) ; v1(66.475,30.225) 66.65,30.225 66.925,30.5 66.925,50.6 68.6,52.275 J1.7@71.95,52.275
  Bottom Layer w0.256: v1(40.4,21.325) 40.212,21.325 40.181,21.294 57.544,21.294 v1(66.475,30.225)
SD_MOSI: J1.3 U1.135 | length 62.7
  Top Layer w0.256: U1.135@40.4,25.975 40.4,22.95 v1(41.05,22.3) ; v1@65.675,31.225 65.675,54.275 67.975,56.575 71.775,56.575 J1.3@71.925,56.725
  Bottom Layer w0.256: v1(41.05,22.3) 57.05,22.3 65.625,30.875 v1(65.625,31.225)
SD_SCLK: J1.5 U1.41 | length 37.5
  Top Layer w0.256: U1.41@42.9,47.075 42.9,49.125 52.925,59.15 v1@57.975,59.15 ; v1(67.925,54.525) J1.5@72.15,54.525
  Bottom Layer w0.256: v1(58.125,59.25) 60.75,59.25 65.525,54.475 v1@68.125,54.475
SNI_MODE: R104.2 U2.6 | length 6.4
  Top Layer w0.256: U2.6@55.43,100.35 59.25,100.35 60.175,99.425 R104.2@61.475,99.425
SW1: S2.1 U1.68 | length 28.6
  Top Layer w0.256: v1(27.1,57.875) 29.4,55.575 U1.68@29.4,47.075
  Bottom Layer w0.256: S2.1@10.385,57.56 10.7,57.875 v1(27.1,57.875)
SW2: S2.2 U1.67 | length 30.7
  Top Layer w0.256: v1(25.425,60.075) 26.525,60.075 29.9,56.7 U1.67@29.9,47.075
  Bottom Layer w0.256: S2.2@10.385,60.1 25.475,60.1 25.5,60.075 v1(25.425,60.075)
SW3: S2.3 U1.66 | length 32.6
  Top Layer w0.256: v1(26.775,60.925) 30.4,57.3 U1.66@30.4,47.075
  Bottom Layer w0.256: S2.3@10.385,62.64 24.735,62.64 26.575,60.8 26.7,60.925 v1(26.775,60.925)
SW4: SW2.1 U1.65 | length 36.6
  Top Layer w0.256: SW2.1@10.05,69.6 10.925,69.6 14.775,65.75 v1(14.825,65.75) ; v1(28.225,60.65) 30.9,57.975 U1.65@30.9,47.075
  Bottom Layer w0.256: v1(14.825,65.75) 17.225,63.35 25.525,63.35 v1(28.225,60.65)
TCK: P6.2 R92.1 U1.109 | length 33.3
  Top Layer w0.256: v1@26.7,23.825 27.4,24.525 U1.109@27.4,25.975
  Bottom Layer w0.256: P6.2@2,8.84 7.29,8.84 22.325,23.875 v1@26.675,23.875
  other v1: 26.675,23.825
TMS: P6.3 R87.1 U1.105 | length 32.4
  Top Layer w0.256: v1(21.525,27.975) 21.65,27.975 22.95,29.275 U1.105@25.6,29.275
  Bottom Layer w0.256: P6.3@2,11.38 5.28,11.38 R87.1@5.325,11.425 ; R87.1@5.65,11.65 5.825,11.475 7.9,11.475 21.525,25.1 v1(21.525,27.975)
VCC: C5.1 C6.1 C7.1 C8.1 C9.1 C10.1 C13.1 C14.1 C15.1 C16.1 C17.1 C18.1 C19.1 C20.1 C21.1 C27.1 C28.1 C29.1 C30.1 C31.1 C32.1 C33.1 C35.1 D5.1 J1.4 P1.1 P1.20 P2.1 P2.2 P3.1 P3.2 P4.1 P4.2 P6.4 P8.4 P8.5 P8.9 P8.12 R80.2 R81.2 R82.2 R83.2 R85.2 R87.2 R88.2 R95.2 R96.1 R97.2 R98.2 R99.2 R100.2 R101.2 R103.2 R106.2 R107.2 U1.6 U1.17 U1.30 U1.32 U1.33 U1.39 U1.52 U1.62 U1.72 U1.84 U1.95 U1.108 U1.121 U1.131 U1.143 U1.144 U2.22 U2.32 U2.48 U4.4 | length 920.3
  Top Layer w0.256: P6.4@2,13.92 P6.4@2.47,13.92 ; C17.1@21.525,23.9 C17.1@21.775,23.9 ; C17.1@21.775,23.7 C17.1@21.775,23.9 ; v1(22.775,32.725) 22.775,32.8 24.25,34.275 U1.95@25.6,34.275 27.975,34.275 v1(28,34.3) ; v1(25.575,49.375) v1@25.6,49.4 ; U1.108@25.6,27.775 23.9,27.775 23.5,27.375 ; U1.84@25.6,39.775 v1(27.925,39.775) 29.031,40.881 29.031,42.969 28.975,43.025 ; v1(25.6,55.15) v1@25.6,49.4 ; U4.4@27.835,100.317 28.102,100.05 v1(29.625,100.05) ; v1(27.9,22.9) 27.875,22.925 24.1,22.925 23.5,23.525 23.5,27.375 ; v1(32.575,54.725) 32.4,54.55 U1.62@32.4,47.075 v1(32.4,44.8) 30.625,43.025 28.975,43.025 ; v1(33.25,22.9) 33.4,23.05 U1.121@33.4,25.975 33.4,28.275 34.125,29 v1(36,29) ; v1@36.3,44.55 v1(36.075,44.775) 36.05,44.8 36.725,44.8 37.4,45.475 U1.52@37.4,47.075 37.4,53.875 37.9,54.375 v1(37.9,55.45) ; 37.975,85.375 38,85.4 38,89.4 v1(44.9,96.3) ; v1(38.2,19.8) 38.2,19.875 38.4,20.075 U1.131@38.4,25.975 38.4,27.75 38.875,28.225 v1(38.875,28.5) ; v1@40.25,84.025 v1(40.375,83.9) R80.2@40.375,85.25 ; v1(41.375,44.55) 43.025,44.55 ; U1.39@43.9,47.075 43.9,45.425 43.025,44.55 ; U1.143@44.4,25.975 U1.144@44.9,25.975 ; R88.2@44.55,18.025 v1(46.3,18.025) 47.825,18.025 51.5,14.35 61.375,14.35 70.36,5.365 P1.20@70.36,2.25 ; v1(45,99.5) 44.829,99.5 45.179,99.85 U2.32@47.07,99.85 47.124,99.904 47.956,99.904 49.5,101.448 U2.22@49.5,104.78 49.5,106.95 v1(49.15,107.3) 48.225,108.225 44.8,108.225 44.025,109 44.025,111.825 44.525,112.325 R82.2@45.475,112.325 ; v1(46.5,83.5) 46.975,83.975 R95.2@46.975,85.45 ; U1.17@46.7,35.775 v1(42.675,35.775) 43.275,35.175 43.275,29.55 43.475,29.35 ; U1.30@46.7,42.275 48.6,42.275 v1(48.625,42.3) 48.675,42.35 48.675,43.125 48.525,43.275 U1.32@46.7,43.275 U1.33@46.7,43.775 43.8,43.775 43.025,44.55 ; C21.1@48.175,23.9 47.825,24.25 46.625,24.25 U1.144@44.9,25.975 ; R83.2@48.425,112.325 R83.2@48.475,112.275 ; v1(48.775,30.65) 48.75,30.65 48.375,30.275 U1.6@46.7,30.275 44.4,30.275 43.475,29.35 ; U2.48@54,96.42 54,94.45 54.65,93.8 v1(55.4,93.8) ; v1(69,55.6) v1@69.025,55.625 ; C17.1@21.775,23.9 21.775,25.65 23.5,27.375 ; v1@25.6,49.4 25.6,49.35 27.4,47.55 U1.72@27.4,47.075 27.4,44.725 28.975,43.15 28.975,43.025 ; 43.475,29.35 v1(43.475,28.55) 43.925,28.55 44.9,27.575 U1.144@44.9,25.975
  Top Layer w0.5: R99.2@22.9,98.175 22.9,99.275 v1@23.942,100.317 ; v1(24.125,104.375) 24.225,104.475 v1(24.225,105.575) 24.225,112.275 27.975,116.025 36.2,116.025 ; D5.1@31.15,108.925 33.875,108.925 36.2,111.25 36.2,116.025 ; R83.2@48.425,112.325 R82.2@45.475,112.325 45.475,114.025 43.475,116.025 36.2,116.025 ; R83.2@48.475,112.275 50.125,112.275 v1(50.45,111.95) ; v1(57.3,111.975) 58.85,111.975 ; v1(59.425,109.575) 57.7,109.575 57.7,110.825 58.85,111.975 ; v1@59.5,104.475 61.625,104.475 63.175,102.925 R81.2@63.175,101.875 65,101.875 65.71,102.585 P8.4@69.66,102.585 ; v1(61.775,94.15) 63.15,94.15 65.175,96.175 65.175,98.1 P8.4@69.66,102.585 ; v1@69.025,55.625 J1.4@72.15,55.625 74.875,55.625 79.25,51.25 79.25,43.3 P2.1@82.3,40.25 P2.2@84.84,40.25 ; P8.5@72.2,103.865 70.92,102.585 P8.4@69.66,102.585 ; R106.2@83.45,87 v1(85.35,87) ; P8.12@83.45,109.85 82.325,109.85 80.775,111.4 78.7,111.4 74.85,115.25 66.2,115.25 63.75,112.8 R97.2@63.75,111.85 63.375,111.85 63.25,111.975 R98.2@59.575,111.975 58.85,111.975
  Top Layer w0.762: R103.2@7.55,87.425 9,87.425 ; v1(9.05,95.025) 9,94.975 9,87.425 ; C33.1@9.75,81.025 10.85,82.125 R96.1@10.85,87.425 9,87.425 ; v1@24.125,100.317 U4.4@27.835,100.317 ; P3.1@48.75,75.875 54.95,69.675 v1(54.95,65.325) ; v1(56.35,61.95) 58.288,61.95 v1(58.338,61.9)
  Top Layer w1: R96.1@10.85,87.425 35.4,87.425 37.45,85.375 37.975,85.375 R80.2@40.25,85.375
  Bottom Layer w0.256: R87.2@5.175,13.05 4.875,13.05 4.005,13.92 P6.4@2,13.92 0.675,12.595 0.675,3.475 3.225,0.925 20.175,0.925 21.5,2.25 P1.1@22.1,2.25 22.1,4.725 27.9,10.525 v1(27.9,22.9) v1(33.25,22.9) ; 18.825,37.388 18.7,37.263 18.7,33.8 19.775,32.725 v1(22.775,32.725) 22.55,32.5 22.55,27.3 22.9,26.95 v1(22.9,26.9) ; C10.1@25.6,52.725 v1(25.6,55.15) ; 25.707,37.388 28.588,37.388 29.4,38.2 C7.1@29.4,39.65 ; v1(28,34.3) C16.1@29.35,34.3 ; v1@28.05,39.65 v1(27.925,39.775) C7.1@29.275,39.775 ; v1(29.625,100.05) 29.625,98.35 C35.1@29.8,98.175 ; C6.1@32.1,43.55 32.1,44.5 v1(32.4,44.8) 36.05,44.8 v1(36.075,44.775) C18.1@38.025,44.775 ; v1(32.575,54.725) 32.575,60.7 32.6,60.725 ; v1(36,29) 37.183,29 C20.1@37.569,28.615 38.76,28.615 v1(38.875,28.5) C19.1@41.646,28.5 ; C18.1@38.125,44.875 41.05,44.875 v1(41.375,44.55) ; v1(38.2,19.8) 39.975,18.025 v1(46.3,18.025) ; v1(40.375,83.9) 40.4,83.9 40.8,83.5 v1(46.5,83.5) ; C19.1@41.861,28.284 42.127,28.55 v1(43.475,28.55) ; C9.1@43.075,44.55 v1(41.375,44.55) ; v1(44.9,96.3) 45,96.4 v1(45,99.5) 45,99.778 45.347,100.125 C28.1@46.45,100.125 46.45,96.125 47.4,95.175 54.45,95.175 55.4,94.225 v1@55.4,93.925 ; C13.1@45.1,36.05 42.95,36.05 v1(42.675,35.775) 40.975,37.475 40.975,44.15 v1(41.375,44.55) ; C14.1@46.325,30.625 48.75,30.625 v1(48.775,30.65) ; v1(48.625,42.3) 48.675,42.35 C15.1@50.025,42.35 C5.1@50.025,45.2 ; v1@49.15,107.148 v1(49.15,107.3) ; C30.1@54.15,93.925 v1@55.4,93.925 ; C30.1@54.275,93.8 v1(55.4,93.8) v1@55.4,93.925 ; C27.1@58.85,94.25 58.525,93.925 v1@55.4,93.925 ; P8.9@83.45,96.6 P8.9@84.375,96.6
  Bottom Layer w0.5: P6.4@2,13.92 0.775,15.145 0.775,44.775 1.65,45.65 P4.1@2.75,45.65 P4.2@5.29,45.65 6.725,47.085 6.725,55.425 ; C33.1@9.75,81.025 6.725,78 6.725,55.425 ; v1(24.125,100.4) v1(24.125,104.375) v1@24.125,105.475 ; v1(25.575,49.375) 12.775,49.375 ; 25.707,37.388 18.825,37.388 16.687,37.388 12.775,41.3 12.775,49.375 ; v1(49.15,107.3) 50.45,106 C29.1@50.45,104.075 ; v1(50.45,111.95) 50.475,111.975 v1(57.3,111.975) ; C27.1@58.95,94.15 v1(61.775,94.15) ; v1(59.425,109.575) 59.425,104.65 v1(59.5,104.575) ; P8.12@83.4,109.9 R107.2@83.4,112.7 ; P8.9@83.45,96.6 83.45,93.9 85.35,92 v1(85.35,87) 83.9,85.55 R85.2@83.9,70.775 ; P8.12@83.45,109.85 81.575,107.975 81.575,105.075 85.025,101.625 85.025,97.25 P8.9@84.375,96.6 ; 6.725,55.425 12.775,49.375
  Bottom Layer w0.762: v1(9.05,95.025) 9.05,99.725 14.9,105.575 v1(24.225,105.575) ; P3.2@48.75,73.335 P3.1@48.75,75.875 46.85,77.775 31.375,77.775 28.125,81.025 C33.1@9.75,81.025 24.15,66.625 26.725,66.625 v1(37.9,55.45) 45.325,55.45 49.6,51.175 C5.1@49.6,45.625 ; v1(54.95,65.325) 54.95,63.375 56.35,61.975 v1(56.35,61.95) ; v1(58.338,61.9) 62.7,61.9 v1(69,55.6)
YLED-: P8.11 R109.1 | length 7.2
  Top Layer w0.256: P8.11@83.45,107.31 85.575,109.435 85.575,111.75 84.5,112.825 84.1,112.825
pads on no net: J1.1 J1.8 J1.9 P8. P8.7 U1.7 U1.8 U1.9 U1.26 U1.28 U1.29 U1.34 U1.37 U1.42 U1.64 U1.69 U1.75 U1.76 U1.96 U1.97 U1.98 U1.99 U1.103 U1.104 U1.110 U1.111 U1.136 U1.137 U2.1 U2.5 U2.8 U2.9 U2.10 U2.11 U2.12 U2.33 U2.38 U2.41 U2.42 U2.45 U2.46

## Polygon pours and split planes (outlines as drawn)
GND on Top Layer "Bottom Layer-No Net" (solid, remove dead copper, pour order 8): 87.525,117.257 87.218,116.95 0.375,116.95 0.375,0.35 0.3,0.275 0.325,0.25 87.45,0.25
NetR96_2 on Top Layer "Bottom Layer-No Net" (solid, remove dead copper, pour order 6): 9.9,98.325 10.3,97.925 23.025,97.925 23.025,88.975 23.525,88.475 23.325,88.275 9.8,88.275 9.8,98.175 9.875,98.25
GND on Bottom Layer "Bottom Layer-No Net" (solid, remove dead copper, pour order 0): 87.475,117.025 87.325,117.175 0.375,117.175 0.375,0.325 0.45,0.25 87.475,0.25

## Keep-outs
Keep-Out Layer:
  lines w0.254: 0,0 87.6,0 ; 0.075,83.525 0.075,117.257 87.6,117.257 87.6,-0.025
  lines w0.256: 0,0 0,81.61 0,117.257 87.525,117.257 ; 317.574,117.254 317.576,117.257

## Other copper
Top Layer:
  pour cut-out: 32.925,100.4 33,96.1 32.925,96.175 27.35,96.175 27.35,100.4 27.4,100.45
  pour cut-out: 59.5,39.275 59.65,39.425 63.65,39.425 63.65,36.525 63,35.875 59.425,35.875
Bottom Layer:
  rectangle: 297.891,56.54 302.616,61.163

## Silkscreen, mask and mechanical layers (free items; w line width, h text height)
Top Overlay:
  text "RESET" at 75.325,73.625 h2

## Text inside footprints (layer, text, board x,y; h text height)
C22: Bottom Overlay "+" at 81.56,71.03 h0.75
P2: Top Overlay "20" at 84.332,15.866 h1.27 r270; Top Overlay "19" at 81.792,15.866 h1.27 r270; Top Overlay "1" at 81.792,42.79 h1.27 r270; Top Overlay "2" at 84.332,42.79 h1.27 r270
P3: Top Overlay "2" at 51.29,73.843 h1.27 r180; Top Overlay "1" at 51.29,76.383 h1.27 r180; Top Overlay "19" at 24.366,76.383 h1.27 r180; Top Overlay "20" at 24.366,73.843 h1.27 r180
P4: Top Overlay "20" at 4.782,21.266 h1.27 r270; Top Overlay "19" at 2.242,21.266 h1.27 r270; Top Overlay "1" at 2.242,48.19 h1.27 r270; Top Overlay "2" at 4.782,48.19 h1.27 r270